# Altium PCB TIDA-010056.PcbDoc (part 3 of 4)
Units mil, origin at the board's own origin, x right, y up, seen from the top; angles counter-clockwise.
Board outline 2716.54 x 2756 mil, 4 copper layers (Top Layer, GND, PWR, Bottom Layer), stack 63.2 mil thick; 152 components, 93 nets, 418 pads, 601 vias.
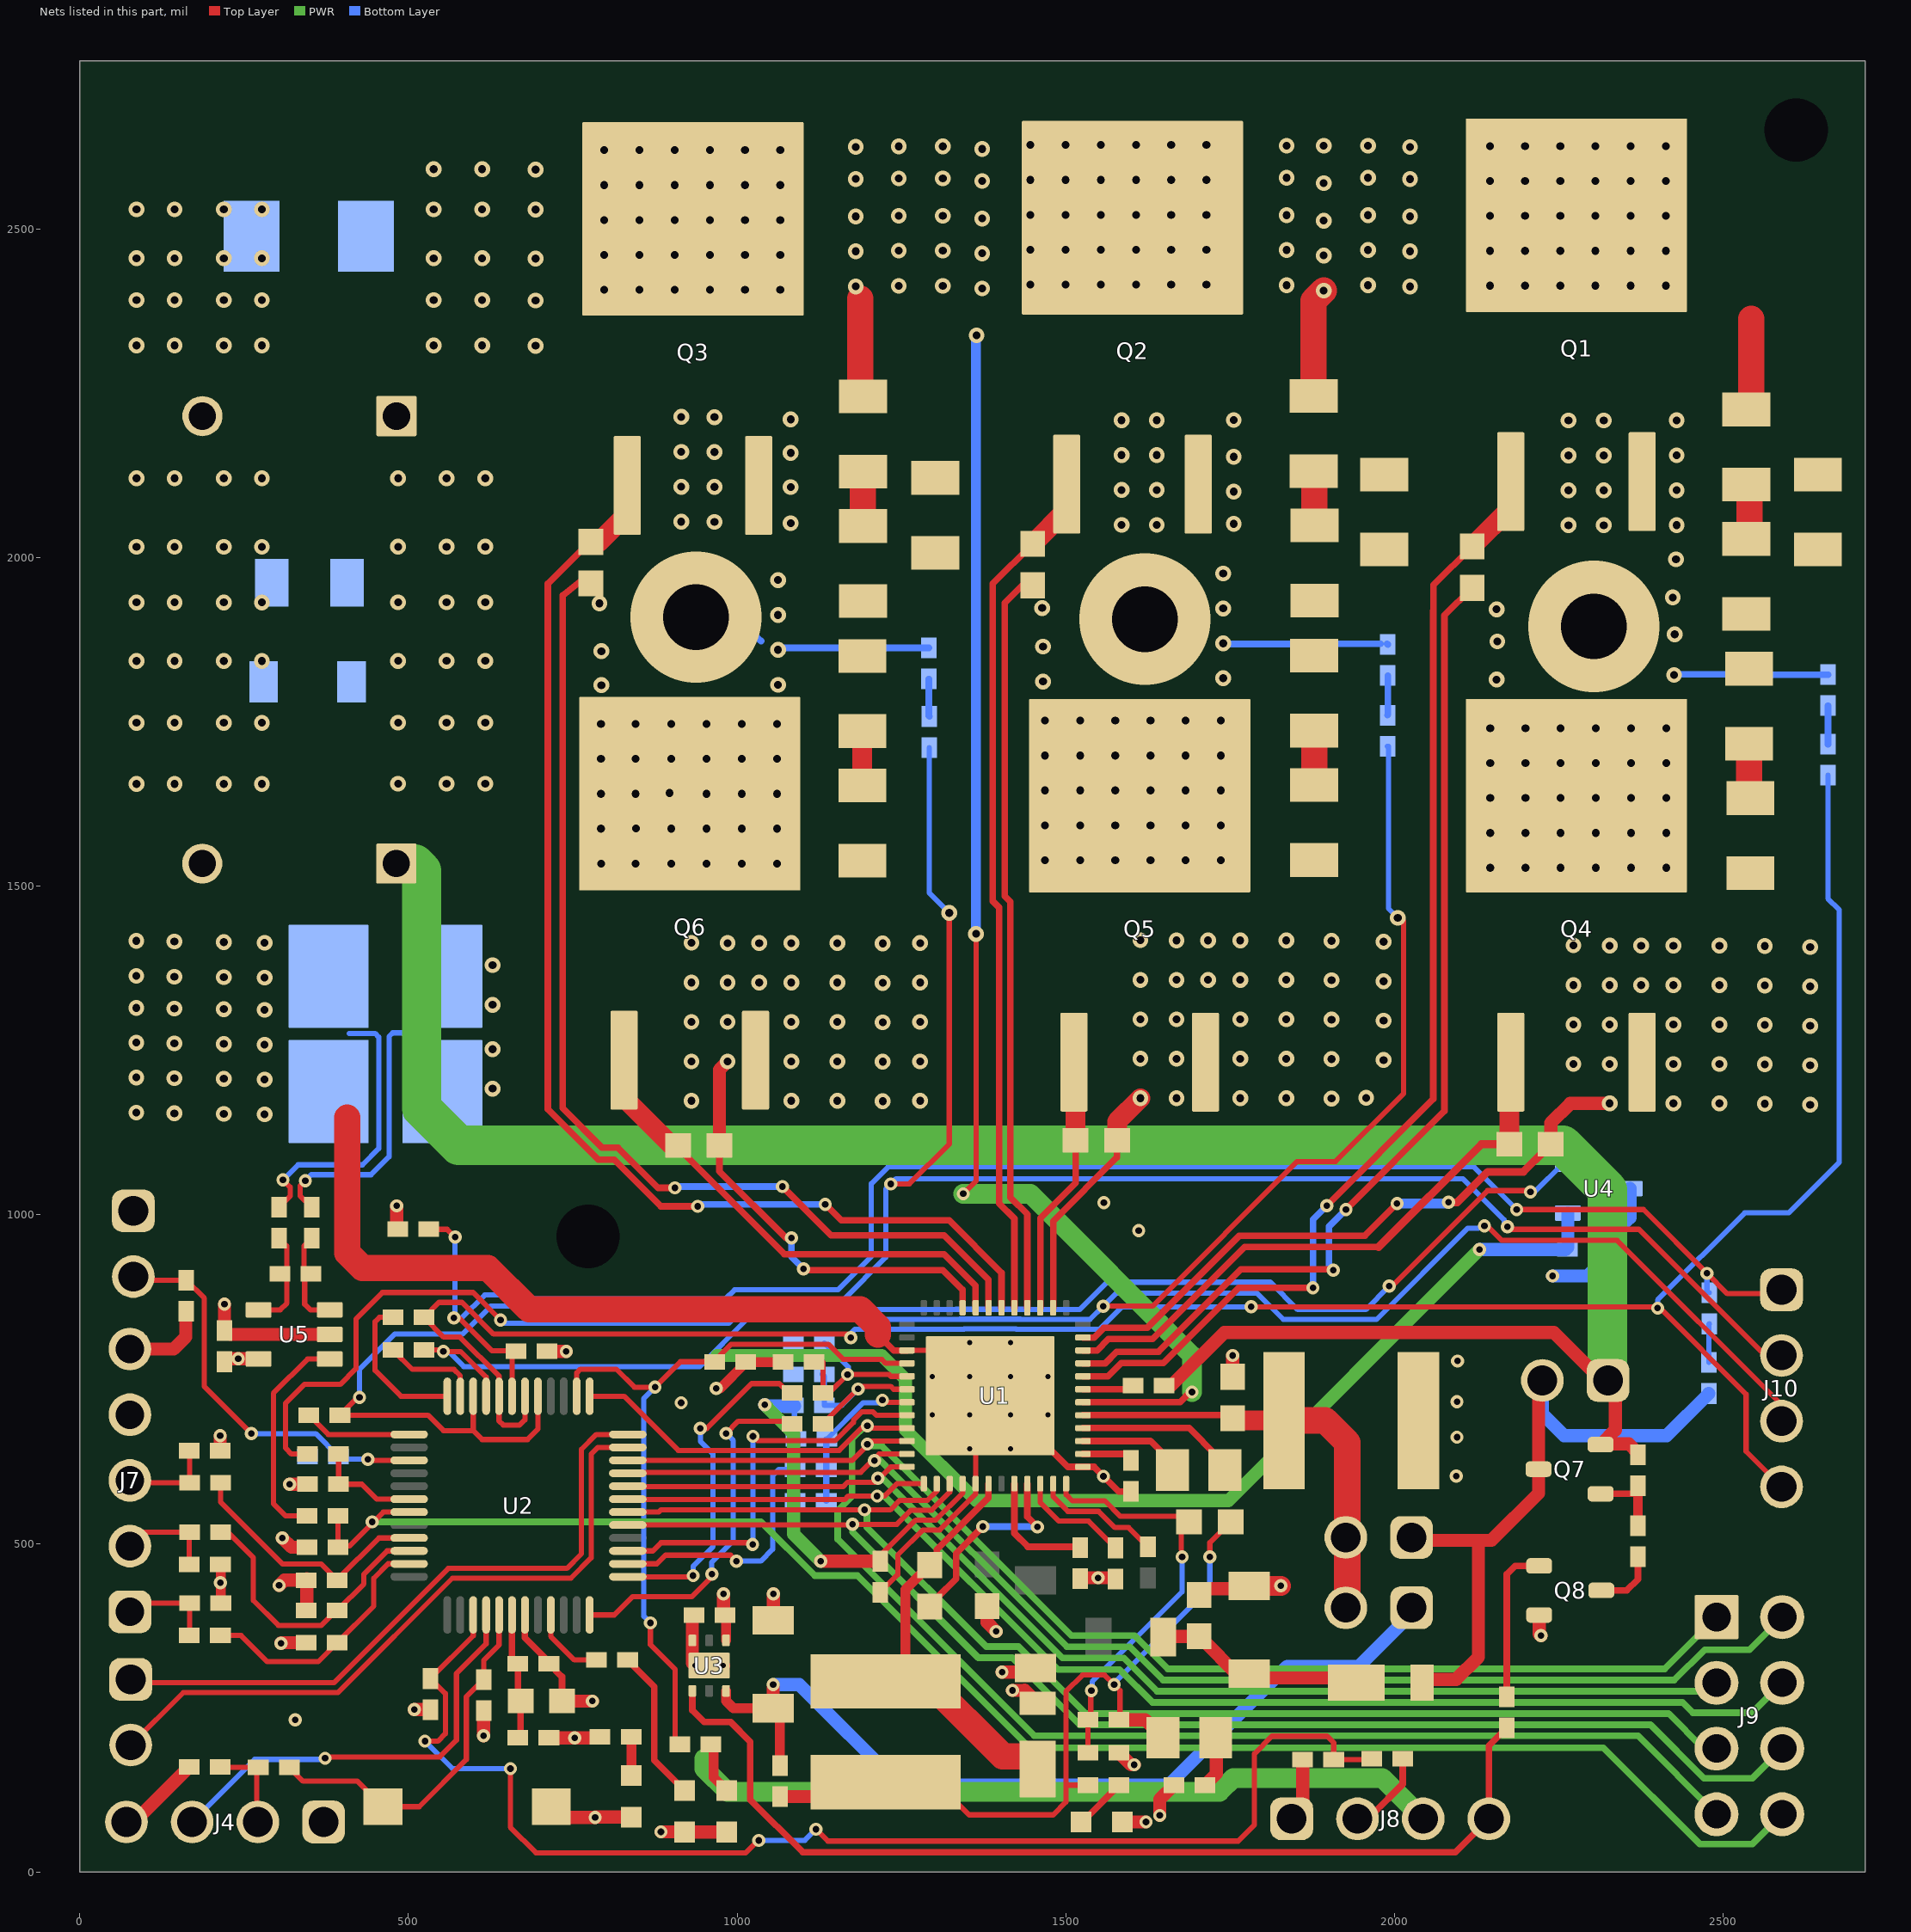
[diagram p4: the nets of this part, all layers, seen from the top]

## Part data (continued)
R63: library part CMP-0026660-1, "RES, 1.00 M, 1%, 0.1 W, 0402", Manufacturer=Panasonic, Power_W=100mW, Supplier Part Number 1=P1.00MLCT-ND, TempCo="100 ppm/C", Tolerance_%=1%, Value2=0.1W, Value_Code=1M00, ValueDisplayed=1.00M, AEC Category=Q200, AEC Qualified=?, ComponentLink1Description="Datasheet link", ComponentLink1URL=http://industrial.panasonic.com/www-data/pdf/AOA0000/AOA0000CE2.pdf, CompType=Resistor, EIA_Code=E96, LatestRevisionDate=2017-03-09, MountType=SMT, PackageReference=0402, PartNumber=ERJ-2RKF1004X, Published=2008-06-26, Publisher="Texas Instruments", Res_ohm=1M, RoHS=Y, SizeArea_mm2=0.5, SizeX_mm=1, SizeY_mm=0.5, SizeZ_mm=0.6, Supplier 1=Digi-Key, Supplier 2=Newark, Supplier 3=Mouser, Supplier Part Number 2=64R5250, Supplier Part Number 3=667-ERJ-2RKF1004X, Technology="Thick Film", U/M=EA, Value1=1%, VDC_V=50V
S1: library part CMP-0002196-1, "Switch, Tactile, SPST, 12 V, SMD", CurrentRating_mA=50A, Manufacturer="Wurth Elektronik", Supplier Part Number 1=31T8978, Circuit=SPST, ComponentLink1Description="Datasheet URL", ComponentLink1URL=http://katalog.we-online.de/em/datasheet/434121025816.pdf, CompType=Switch, LatestRevisionDate=2017-03-09, MountType=SMT, Orientation="Top Actuated", PackageReference="SMD, 6x3.9mm", PartNumber=434121025816, PositionCount=1, Publisher="Texas Instruments", RoHS=Y, Supplier 1=Newark, Supplier 2=Farnell, Supplier Part Number 2=1867991, SwitchFunction=Off-On, VDC_V=12V
U1: library part CMP-0013784-3, "100-V Three-Phase Smart Gate Driver With Buck Regulator, RGZ0048L (VQFN-48)", Alternate Manufacturer="Texas Instruments", Alternate PartNumber=DRV8350RHRGZT, Operating Temperature Range="-40 to 125 C", Rating=Catalog, AEC Category=Q200, AEC Qualified=N, ComponentLink1Description="Datasheet Link", ComponentLink1URL=http://www.ti.com/lit/ds/symlink/drv8350r.pdf, ComponentLink2Description="Product Folder", ComponentLink2URL=http://www.ti.com/product/drv8350r, ComponentLink3Description="Online Datasheet", ComponentLink3URL=http://www.ti.com/product/drv8350r/datasheet, CompType=IC, Manufacturer="Texas Instruments", MountType=SMT, PackageDescription=VQFN-48, PackageReference=RGZ0048L, PartNumber=DRV8350RHRGZR, RoHS=Y, SizeArea_mm2=49, SizeAreaWB_mm2=81, SizeX_mm=7, SizeY_mm=7, SizeZ_mm=1
U2: library part CMP-0013603-2, "Mixed-Signal Microcontroller, PT0048A (LQFP-48)", Alternate Manufacturer="Texas Instruments", ComponentLink1Description="Datasheet Link", ComponentLink1URL=https://sps06.itg.ti.com/sites/KMS/crossdivteams/altium/docs/ComponentDatasheets/SLASEC4_MSP430FR2355.int.1.0.pdf, CompType=IC, LatestRevisionDate=2017-03-09, Manufacturer="Texas Instruments", MountType=SMT, PackageDescription=LQFP-48, PackageReference=PT0048A, PartNumber=MSP430FR2355TPTR, Publisher="Texas Instruments", SizeArea_mm2=81, SizeAreaWB_mm2=121, SizeX_mm=9, SizeY_mm=9, SizeZ_mm=1.6, U/M=EA
U3: library part CMP-0066782-1, "150-mA, 30-V, Ultra-Low IQ, Wide Input Low-Dropout Regulator with Reverse Current Protection, DRV0006A (WSON-6)", Alternate Manufacturer="Texas Instruments", Alternate PartNumber=TPS70933DRVT, ComponentLink1Description="Datasheet Link", ComponentLink1URL=http://www.ti.com/lit/ds/symlink/tps709.pdf, CompType=IC, Footprint Path 6=C:\AltiumLibraries\Footprints\TI\.PcbLib, Green_EU RoHS=Passed, Green_EU RoHS-2=Passed, Green_Lifecycle=Active, Green_REACh=Passed, LatestRevisionDate=2017-06-09, Manufacturer="Texas Instruments", MountType=SMT, PackageDescription=WSON-6, PackageReference=DRV0006A, PartNumber=TPS70933DRVR, Publisher="Texas Instruments", RoHS=Y, SizeArea_mm2=4.0, SizeAreaWB_mm2=9.0, SizeX_mm=2.0, SizeY_mm=2.0, SizeZ_mm=0.8, U/M=EA
U4: library part CMP-0013240-1, "TMP235A4DBZR, DBZ0003A (SOP-3)", Alternate Manufacturer="Texas Instruments", ComponentLink1Description="Datasheet Link", ComponentLink1URL="https://sps06.itg.ti.com/sites/KMS/crossdivteams/altium/docs/ComponentDatasheets/TMP235DBZ MECH DRAWING.docx", CompType=IC, Footprint Path 6=C:\AltiumLibraries\Footprints\TI\.PcbLib, LatestRevisionDate=2017-03-09, Manufacturer="Texas Instruments", MountType=SMT, PackageDescription=SOP-3, PackageReference=DBZ0003A, PartNumber=TMP235A4DBZR, Publisher="Texas Instruments", SizeArea_mm2=7.5, SizeAreaWB_mm2=14, SizeX_mm=2.5, SizeY_mm=3, SizeZ_mm=1.12, U/M=EA
U5: library part CMP-0013061-1, "Low- and High-Side Measurement, Multichannel, Voltage Output, Current-Sense Amplifier, DBV0005A (SOT-5)", Alternate Manufacturer="Texas Instruments", PartNumber=INA180A3IDBVR, ComponentLink1Description="Datasheet Link", ComponentLink1URL=https://sps06.itg.ti.com/sites/KMS/crossdivteams/altium/docs/ComponentDatasheets/INA180.pdf, CompType=IC, Footprint Path 6=C:\AltiumLibraries\Footprints\TI\.PcbLib, LatestRevisionDate=2017-03-09, Manufacturer="Texas Instruments", MountType=SMT, PackageDescription=SOT-5, PackageReference=DBV0005A, Publisher="Texas Instruments", SizeArea_mm2=8.12, SizeAreaWB_mm2=14.82, SizeX_mm=2.8, SizeY_mm=2.9, SizeZ_mm=1.45, U/M=EA
ZZ1: library part AssemblyNoteLabel, Alternate Manufacturer=-, Alternate PartNumber=-, ClassName=AssemblyNote, CompType=AssemblyNote, LatestRevisionDate=2012-07-31, LatestRevisionNote="Initial Version", Publisher="Texas Instruments", SymbolCreator=a0412235, SymbolVersion=2012-06-14
ZZ2 ZZ3 ZZ4: library part AssemblyNote, Alternate Manufacturer=-, Alternate PartNumber=-, ClassName=AssemblyNote, CompType=AssemblyNote, LatestRevisionDate=2012-06-14, LatestRevisionNote="Initial Version", Publisher="Texas Instruments", SymbolCreator=codlsc, SymbolVersion=2010-05-18

## Via types
v1: diameter 24, hole 12, Top Layer to Bottom Layer, 476 vias
v2: diameter 20, hole 10, Top Layer to Bottom Layer, tented both sides, 108 vias
v3: diameter 19.68, hole 7.87, Top Layer to Bottom Layer, 14 vias
v4: diameter 200, hole 100, Top Layer to Bottom Layer, 3 vias

## Nets (pads, with @x,y where several pads share a name; then routed paths per layer and width w, separated by ;. In a path a pad name is that pad's centre, name@x,y a point inside that pad or via, vN(x,y) a via of type N, cw(c..) or ccw(c..) an arc to the next point about the centre after c; other vN are vias at no path point)
3.3V: C19.2 C37.1 C45.1 D5.2 D6.2 J4.4 J7.5 J8.3 R7.2 R50.1 R51.2 R53.2 R54.2 R55.2 R56.2 R59.2 R66.2 U3.1 U4.1 U5.5 | length 3541.3
  Top Layer w8: U5.5@271.46,781 U5.5@271.87,780.6
  Top Layer w15: R56.2@214.4,408.81 R55.2@214.4,456.81 ; D6.2@919.99,61 D6.2@920.29,60.7 ; v2(968,736) 974.32,736 R66.2@1014.32,776 ; U3.1@983.04,352.33 C37.1@983.04,379.96 ; R66.2@1013.15,776 R66.2@1014.32,776 ; R7.2@1069.87,776.38 1069.49,776 R66.2@1014.32,776
  Top Layer w20: J4.4@70.81,76 82.38,76 R51.2@166.38,160 ; J7.5@76.16,795.81 142.81,795.81 161,814 R53.2@161,851.38 ; R54.2@213.37,641 v2(213.37,663.76) ; C19.2@219,781 U5.5@271.46,781 ; R50.1@713.62,204.24 713.87,204 v2(753,204) 789.71,204 R59.2@791.38,205.66 ; v2(884,61) D6.2@919.99,61 ; D6.2@920.29,60.7 D5.2@984.29,60.7 ; C37.1@979.1,393.96 v2(979.1,423.16)
  PWR w20: 969,786 1220,786 1256,750 1256,673 1364,565 1747.31,565 v2(2129.32,947)
  PWR w30: 950,172.47 950,157.37 985.37,122 1734,122 1755,143 1981.58,143 J8.3@2043.75,80.83
  Bottom Layer w20: v2(2129.32,947) 2258.34,947 2259.34,948 2260.23,947.1 2263.76,950.62 U4.1@2263.76,1002.6
  other v2: 213.79,440.19 241,781
15V: C38.1 J2.1 R28.2 U3.6 | length 1370.8
  Top Layer w15: U3.6@983.04,275.56 983.04,260.32 994.29,249.07 C38.1@1055,249.07 1065,239.07 R28.2@1065,161.97
  Top Layer w20: v2(1054.82,285) 1054.82,249.25 C38.1@1055,249.07
  Bottom Layer w20: v2(1054.82,285) 1094.72,285 1247.72,132 1655.91,132 1836.91,313 1946,313 2026,393 J2.1@2026,402
BEMF_A: J10.4 R40.1 R46.2 U2.30 U2.32 | length 3556.9
  Top Layer w8: U2.30@677.16,723.8 677.16,688.16 669,680 644,680 637.79,686.21 U2.32@637.79,723.8 637.79,754.6 578.39,814 553.61,814 R46.2@523.62,843.99 546.33,866.7 581.17,866.7 629.39,818.48 1167.52,818.48 v2(1173,813) ; v2(1782,860) 2402,860 2535,727 2535,640 J10.4@2589,586
  Bottom Layer w8: v2(1173,813) 1173,819.35 1179.51,825.85 1344.98,825.85 1345.35,826.23 1424.43,826.23 1424.8,825.85 1551.85,825.85 1586,860 v2(1782,860) ; v2(2400.49,858) 2400.49,870.49 2533,1003 2600,1003 2676.45,1079.45 2676.45,1464.5 2659.64,1481.31 R40.1@2659.64,1668.89
BEMF_AL: R46.1 U2.36 | length 230.5
  Top Layer w8: R46.1@476.38,843.99 455.77,843.99 449,837.21 449,763.27 488.46,723.8 U2.36@559.05,723.8
BEMF_B: J10.3 R41.1 R45.2 U2.33 | length 3565.3
  Top Layer w8: R45.2@523.62,794.38 558.62,794.38 v2@556.24,792 ; v2(553,792) v2@556.24,792 ; U2.33@618.1,723.8 618.1,753.07 579.17,792 v2@556.24,792 ; v2(1557,861) 1632,861 1852,1081 1910.45,1081 2014,1184.55 v1@2014,1447 ; v2(2137,983) 2141.3,983 2163.3,961 2339,961 2589,711 J10.3@2589,686
  Bottom Layer w8: v2(553,792) 561,792 584,769 943,769 1014.85,840.85 1338.76,840.85 1339.14,841.23 1430.64,841.23 1431.02,840.85 1536.85,840.85 v2(1557,861) 1577,881 1790.7,881 1830.85,840.85 1972.85,840.85 2111.59,979.59 2127.56,979.59 ; R41.1@1989.45,1713.11 1990.86,1713.11 1990.86,1466.33 v1(2005.19,1452)
BEMF_BL: R45.1 U2.35 | length 154.2
  Top Layer w8: R45.1@476.38,794.38 505.89,764.87 569.03,764.87 578.73,755.16 U2.35@578.73,723.8 ; R45.1@478.38,802.38 R45.1@481.38,799.38
BEMF_C: J10.2 R42.1 R44.2 U2.29 U2.34 | length 3704.6
  Top Layer w8: v2(425.38,722) 422.47,722 R44.2@395.62,695.15 529.63,695.15 553.2,671.58 598.42,671.58 ; U2.34@598.42,723.8 598.42,671.58 ; U2.29@696.84,723.8 696.84,673.84 681,658 612,658 598.42,671.58 ; v2(1233.72,1047) 1262,1047 1322.76,1107.76 v1(1322.76,1459.52) ; v2(2172,982) 2176,978 2372,978 2564,786 J10.2@2589,786
  Bottom Layer w8: v2(425.38,722) 425.38,764.87 478.91,818.39 582.39,818.39 625,861 670.93,861 674.93,857 675,857 682,850 981.34,850 1002.19,870.85 1161.49,870.85 1226,935.36 1226,1039.28 v2(1233.72,1047) 1241.72,1055 2104.14,1055 2166.79,992.35 v2@2166.79,982.79 ; R42.1@1292.45,1711.23 1292.45,1489.83 v1(1322.76,1459.52)
BEMF_CL: R44.1 U2.37 | length 164.8
  Top Layer w8: R44.1@348.38,695.15 377.8,665.73 U2.37@500.98,665.73
DC_FB: C33.1 J10.1 R39.1 R47.2 U2.31 | length 2658.7
  Top Layer w8: R47.2@530.62,978 558.84,978 v2(570.84,966) ; v2(569,843) 577,843 627,793 C33.1@657.65,793 ; U2.31@657.47,723.8 657.47,792.82 C33.1@657.65,793 ; C33.1@663.64,792.19 662.82,793 C33.1@657.65,793 ; v2(2186,1008) 2379,1008 v2@2475.74,911.26 ; v2(2475.49,911) 2506.49,880 2583,880 J10.1@2589,886
  Bottom Layer w8: v2(569,843) 581,843 616,878 675.15,878 681.15,872 982.12,872 995.98,885.85 1153.42,885.85 1204,936.44 1204,1047.36 1229.64,1073 2121,1073 v2(2186,1008) ; v2@569.7,843.7 570.84,844.84 v2(570.84,966) ; v2(2475.49,911) 2475.49,884.76 R39.1@2479,881.24 ; J10.1@2584.24,881.24 J10.1@2589,886
DIR: C39.1 J6.2 R53.1 U2.39 | length 620.2
  Top Layer w8: J6.2@76.16,906 81.54,900.62 R53.1@161.74,900.62 ; R53.1@162.37,900 R53.1@161.74,900.62 ; v2(261,667) 189.32,738.68 189.32,873.05 R53.1@161.74,900.62 ; v2(438,628) 439.64,626.36 U2.39@500.98,626.36
  Bottom Layer w8: v2(261,667) 358.71,667 C39.1@393.62,632.09 397.71,628 v2(438,628)
DVDD: C9.1 R5.1 R8.1 U1.40 | length 634.7
  Top Layer w8: C9.1@1217.64,472.82 1217.64,481.38 1271.79,535.54 1302.1,535.54 1343.08,576.52 U1.40@1343.08,590.82
  Top Layer w20: v2(1127,473) 1127.18,472.82 C9.1@1217.64,472.82
  PWR w20: v2@1046,707 1086,667 1086,514 v2(1127,473)
  Bottom Layer w8: R8.1@1087.25,665.86 R5.1@1087.25,708.41
  Bottom Layer w20: v2(1042,711) 1044,709 R5.1@1087.38,709
ENABLE_GD: J9.7 U1.33 U2.25 | length 2239.9
  Top Layer w8: U2.25@775.58,723.8 827.98,723.8 910.42,641.36 1155.4,641.36 v2@1198.04,684 ; v2(1198.04,679) 1201.57,675.46 U1.33@1258.43,675.46
  PWR w10: v2(1198.04,679) 1194.89,679 1175,659.11 1175,572 1153,550 1153,506 1452,207 2370.78,207 J9.7@2490,87.78
FAULT: R64.1 R66.1 U1.28 U2.26 | length 1168.6
  Top Layer w8: U2.26@755.9,723.8 755.9,759.57 761.54,765.21 816,765.21 843.52,737.7 v2(875,737.7) 913.53,776.22 913.53,776.38 964.38,776.38 991,803 1138.6,803 1161.6,780 1220,780 1226.11,773.89 U1.28@1258.43,773.89 ; v2(868,379) 868,346 905.76,308.24 905.76,194.12 R64.1@912.72,194.12
  Bottom Layer w8: v2(868,379) 858,389 858,720.7 v2(875,737.7)
GHA: C20.1 Q1.1 U1.8 | length 1757.1
  Top Layer w10: U1.8@1526.15,754.2 1564.2,754.2 1584.54,774.54 1648.54,774.54 1763,889 v2(1876,889) ; v2(1897,1014) 2059,1176 2059,1919.05 2059.45,1919.49 2059.45,1958.44 C20.1@2118.02,2017.01
  Top Layer w30: C20.1@2118.02,2017.01 2176.95,2075.94 Q1.1@2176.95,2115.73
  Bottom Layer w10: v2(1876,889) 1876,993 v2(1897,1014)
GHB: C22.1 Q2.1 U1.17 | length 1315.3
  Top Layer w10: U1.17@1421.82,858.54 1421.82,994.39 1398.8,1017.42 1398.8,1467.64 1389,1477.44 1389,1960.56 C22.1@1449.45,2021.01 ; Q2.1@1493.04,2109 Q2.1@1494.33,2107.71
  Top Layer w30: C22.1@1449.45,2021.01 1501.45,2073.01 Q2.1@1501.45,2111.86
GHC: C46.1 Q3.1 U1.18 | length 1862.9
  Top Layer w10: C46.1@777.45,2026.01 712.06,1960.62 712.06,1160.74 788.89,1083.91 812.91,1083.91 883.82,1013 v2(940,1013) ; v2(1134,1016) 1158.5,991.5 1322.5,991.5 1402.13,911.87 U1.18@1402.13,858.54
  Top Layer w30: C46.1@777.45,2024.01 789.94,2024.01 832.76,2066.82 Q3.1@832.76,2110.08 Q3.1@832.76,2114.82
  Bottom Layer w10: v2(940,1013) 943.59,1016.59 944.18,1016 v2(1134,1016)
GLA: C48.1 Q4.1 U1.10 | length 904.5
  Top Layer w10: U1.10@1526.15,793.57 1547.57,793.57 1565,811 1632,811 1772,951 1976,951
  Top Layer w12: 1976,951 2132.52,1107.52 C48.1@2174.95,1107.52
  Top Layer w30: C48.1@2174.95,1107.52 2174.95,1230.43 Q4.1@2176.87,1232.35
GLB: C49.1 Q5.1 U1.15 | length 397.1
  Top Layer w10: U1.15@1461.19,858.54 1461.19,994.87 1514.95,1048.64 C49.1@1514.95,1113.52
  Top Layer w30: Q5.1@1512.45,1232.35 1514.95,1229.84 C49.1@1514.95,1113.52
GLC: C47.1 Q6.1 U1.20 | length 756.9
  Top Layer w10: C47.1@897.5,1106 C47.1@903.97,1099.53 ; C47.1@909.95,1105.52 909.95,1101.95 1071.9,940 1315,940 1362.76,892.24 U1.20@1362.76,858.54
  Top Layer w30: Q6.1@824.31,1181.73 824.31,1181.65 900.45,1105.52 C47.1@909.95,1105.52 ; Q6.1@827.9,1181.73 Q6.1@827.9,1235.25
GND: C1.2 C2.2 C3.2 C4.2 C5.2 C6.2 C9.2 C19.1 C23.2 C27.2 C28.2 C29.2 C30.2 C31.2 C32.2 C33.2 C34.2 C35.2 C36.2 C37.2 C38.2 C39.2 C40.2 C41.2 C42.2 C43.2 C44.2 C45.2 D1.1 D2.2 D4.1 D7.1 J4.1 J6.1 J7.4 J8.1 Q8.2 R4.2 R6.1 R10.1 R24.1 R25.1 R27.1 R31.1 R33.1 R34.1 R47.1 R63.1 S1.1 U1.1 U1.27 U1.41 U1.49@1384.89,724.68 U2.7 U3.3 U3.7 U4.3 U5.2 | length 4190.7
  Top Layer w8: R27.1@303.12,1011.62 320,1028.5 320,1042 v2(309,1053) ; C9.2@1217.64,425.57 1244.33,452.27 1244.33,482.33 1282.54,520.54 1308.31,520.54 1362.76,574.99 U1.41@1362.76,590.82 1362.76,702.55 U1.49@1384.89,724.68 1315.99,793.57 U1.27@1258.43,793.57
  Top Layer w10: U2.7@677.16,391.13 677.16,356.38 713.74,319.8 C35.2@713.74,316.88 ; C35.2@713.62,317 C35.2@713.74,316.88 ; C34.2@733.5,260 733.5,297.13 C35.2@713.74,316.88 ; 1214,818 1238.43,793.57 U1.27@1258.43,793.57 ; U1.49@1384.89,724.68 1394.86,724.68 1503.13,616.41 U1.1@1526.15,616.41 1542.97,616.41 1580.46,578.91 C31.2@1599.19,578.91
  Top Layer w20: C19.1@220,823.62 v2(220,864) ; C19.1@229.24,818 U5.2@380.13,818 ; v2(303,436) 311,444 C41.2@344.38,444 ; v2(306,348) 306,349 C43.2@344.38,349 ; v2(308,508) 322,494 C23.2@345.38,494 ; v2(319,590) C44.2@346.38,590 ; C42.2@344.38,398 345.38,399 C41.2@345.38,445.91 ; v2(482,1013.71) 482,979.38 R47.1@483.38,978 ; v2(509,247) C40.2@533.3,247 ; v2(614.31,207.27) C36.2@614.31,245.61 ; C33.2@710.88,792.19 739.81,792.19 v2(740,792) ; S1.1@717,99.35 733.35,83 v2(784,83) 784.5,83.5 D7.1@839,83.5 ; C34.2@733.5,260 v2(779.61,260) ; C37.2@931.86,383.9 U3.3@931.86,352.33 931.86,317.88 v3(935.8,313.95) U3.7@957.45,313.95 v3(979.1,313.95) ; C38.2@1055,382.93 v2(1055,423.16) ; C30.2@1382,403.17 C30.2@1380.47,404.69 1380.47,379.53 v2(1394,366) ; v2(1403,304) 1447.93,304 C29.2@1454,310.07 ; v2(1419,276.26) 1437.04,276.26 1437.35,276.57 D2.2@1457.19,256.73 ; 1535.6,447.57 R33.1@1566.1,447.57 ; R34.1@1584.46,181.54 R34.1@1580.81,181.54 1599.35,163 v2(1604,163) ; D4.1@1586,76 v2(1622,76) ; v2(1643,86) 1643,110.62 R31.1@1664.38,132 ; C28.2@1703,421.5 1712.5,431 1774.72,431 C27.2@1779.19,435.46 ; C6.2@1753.64,753.5 1756,755.86 1754,757.86 v2(1754,786) ; J8.1@1843.75,80.83 1860.38,97.46 R63.1@1860.38,171 ; Q8.2@2220.26,391 2220.26,362.24 v2(2223,359.5)
  Top Layer w30: C27.2@1779.19,435.46 v2(1827.19,435.46)
  Top Layer w40: 407,1148 407,942 430,919 620.82,919 683.35,856.46 1187.04,856.46 1214,829.5 1214,818
  Bottom Layer w8: v2(309,1053) 332,1076 430,1076 454.81,1100.81 454.81,1270.35 449.16,1276 410,1276
  Bottom Layer w20: v2(2240.49,907) 2294,907 2310.62,923.62 C45.2@2310.62,948 2358.24,995.62 U4.3@2358.24,1040
  other v1: 281,1152.89 218.93,1153.57 143.87,1154.36 85.87,1155.51 281,1205.89 218.93,1207.06 143.87,1207.85 85.87,1209 281,1258.85 218.93,1260.06 143.87,1260.85 85.87,1262 281,1312 218.93,1313.02 143.87,1313.81 85.87,1314.96 281,1360.89 218.93,1361.57 143.87,1362.36 85.87,1363.51 281,1413.89 218.93,1415.06 143.87,1415.85 85.87,1417 86.12,1655.79 144,1655.79 219.07,1655.79 276.94,1655.79 86.12,1748.79 144,1748.79 219.07,1748.79 276.94,1748.79 86.12,1842.79 144,1842.79 219.07,1842.79 276.94,1842.79 86.12,1932 144,1932 219.07,1932 276.94,1932 86.12,2016.51 144,2016.51 219.07,2016.51 276.94,2016.51 86.12,2120.79 144,2120.79 219.07,2120.79 276.94,2120.79 86.12,2323 144,2323 219.07,2323 276.94,2323 86.12,2392 144,2392 219.07,2392 276.94,2392 86.12,2455.72 144,2455.72 219.07,2455.72 276.94,2455.72 86.12,2530.21 144,2530.21 219.07,2530.21 276.94,2530.21
  other v2: 327.61,231.27 1549.19,447.54 1557.21,602 2094.19,602.54 2095.19,661.54 914.73,714 2095.19,715.54 2096.19,777.54 1611,976 1558,1018.53
  other v3: 1353.98,643.97 1415.8,643.97 1296.78,695.54 1353.98,695.54 1415.8,695.54 1473,695.54 1296.78,753.81 1353.98,753.81 1415.8,753.81 1473,753.81 1353.98,805.39 1415.8,805.39
HA: C43.1 R61.2 U2.47 | length 390.3
  Top Layer w8: R61.2@213.78,359.81 245.19,359.81 285,320 362.62,320 C43.1@391.62,349 447,404.38 447,446.94 468.95,468.88 U2.47@500.98,468.88
HB: C42.1 R58.2 U2.46 | length 447.7
  Top Layer w8: R58.2@214.16,516.79 225.36,516.79 264,478.15 264,413 301.81,375.19 367.43,375.19 C42.1@387.09,394.85 ; C42.1@387.09,394 C42.1@387.09,394.85 ; C42.1@387.85,399.35 387.85,400 387.09,400.76 C42.1@387.09,394.85 ; U2.46@500.98,488.57 467.42,488.57 432,453.15 432,438.38 C42.1@391.62,398 390.24,398 C42.1@387.09,394.85
HC: C41.1 R57.2 U2.45 | length 390.1
  Top Layer w8: R57.2@213.99,592 213.99,563.01 308.28,468.72 366.9,468.72 C41.1@391.62,444 ; C41.1@392.62,445.91 454.96,508.25 U2.45@500.98,508.25
IA_IDC: C23.1 J9.8 R23.2 U2.43 | length 2546
  Top Layer w8: R23.2@392.62,542 C23.1@392.62,494 394.62,496 410,496 461.62,547.62 U2.43@500.98,547.62
  PWR w10: v2(444.56,532.69) 1036.19,532.69 1117.89,451 1182.96,451 1444.96,189 2318,189 2464.69,42.31 2544.54,42.31 J9.8@2590,87.78
INH_A: J9.1 U1.34 U2.22 | length 1895.1
  Top Layer w8: U2.22@833.65,626.36 1175.36,626.36 v2@1199,650 ; v2@1204.78,655.78 U1.34@1258.43,655.78
  PWR w10: v2(1198,651) 1201,648 1220.24,648 1508.74,359.5 1604.5,359.5 1655,309 2411.22,309 J9.1@2490,387.78
INH_B: J9.3 U1.36 U2.20 | length 1891.2
  Top Layer w8: U2.20@813.34,586.2 1161.2,586.2 1168,593 1210.03,593 1233.44,616.41 U1.36@1258.43,616.41
  PWR w10: v2(1214,599) 1221.16,599 1494.65,325.5 1588.37,325.5 1638.87,275 2464.45,275 2482.22,292.78 2482.22,280 J9.3@2490,287.78
INH_C: J9.5 U1.38 U2.18 | length 1954.5
  Top Layer w8: U2.18@833.65,547.62 880.62,547.62 884,551 v2(1194,551) 1233,551 1247.54,565.54 1289.67,565.54 1303.71,579.57 U1.38@1303.71,590.82
  PWR w10: v2(1194,551) 1197.36,547.64 1197.36,524.64 1379,343 1428,343 1530,241 2417,241 2470.22,187.78 J9.5@2490,187.78
INL_A: J9.2 U1.35 U2.21 | length 2001.2
  Top Layer w8: U2.21@830.22,608.58 U2.21@833.65,608.58 ; U2.21@833.65,606.68 834.98,608 1188,608 1216.09,636.09 U1.35@1258.43,636.09
  PWR w10: v2@1208,628 1216.2,628 1501.7,342.5 1597.45,342.5 1647.96,292 2426,292 2472,338 2540.22,338 J9.2@2590,387.78
  other v2: 1209,626
INL_B: J9.4 U1.37 U2.19 | length 2013.1
  Top Layer w8: U2.19@813.34,566.51 1163.57,566.51 1169.06,572 v2(1213,572) 1224.3,572 1243.12,590.82 U1.37@1284.02,590.82
  PWR w10: v2(1213,572) 1224.12,572 1488.12,308 1581.83,308 1631.83,258 2438,258 2453.69,242.31 2544.54,242.31 J9.4@2590,287.78
INL_C: J9.6 U1.39 U2.17 | length 2123.7
  Top Layer w8: U2.17@833.65,527.94 1174.3,527.94 v2(1175.36,529) 1243,529 1264.54,550.54 1295.88,550.54 1323.39,578.05 U1.39@1323.39,590.82
  PWR w10: v2(1175.36,529) 1175.36,517.48 1366.85,326 1419.03,326 1521.03,224 2389.48,224 2471.17,142.31 2544.54,142.31 J9.6@2590,187.78
LED: R65.1 U2.9 | length 117.1
  Top Layer w8: U2.9@716.53,391.13 716.53,358.45 752.51,322.47 R65.1@786.09,322.47
NetC5_1: C5.1 C6.1 J1.2 J2.2 U1.5 | length 671.8
  Top Layer w10: U1.5@1526.15,695.15 1741.08,695.15 C6.1@1745.19,691.04
  Top Layer w20: C6.1@1745.19,691.04 C6.1@1756,691.04
  Top Layer w30: C6.1@1756,691.04 1759.95,687.09 C5.1@1831.83,687.09
  Top Layer w40: C5.1@1831.83,687.09 1894.74,687.09 1928.19,653.64 1928.19,404.19 J2.2@1926,402
NetC7_1: C7.1 U1.7 | length 78.5
  Top Layer w8: C7.1@1596.9,734.52 C7.1@1602.38,740
  Top Layer w10: U1.7@1526.15,734.52 C7.1@1596.9,734.52
NetC8_1: C8.1 U1.3 | length 160.6
  Top Layer w10: U1.3@1526.15,655.78 1628.65,655.78 1662.19,622.24 C8.1@1662.19,611.54
NetC8_2: C8.2 U1.4 | length 230.3
  Top Layer w10: U1.4@1526.15,675.46 1687.54,675.46 1729.69,633.31 C8.2@1729.69,624.04
NetC13_1: C13.1 R1.1 | length 83.8
  Top Layer w40: R1.1@2532.51,2109.66 R1.1@2534.76,2111.91 ; C13.1@2540.51,2029.09 R1.1@2540.51,2109.66
NetC14_1: C14.1 R2.1 | length 83.4
  Top Layer w40: R2.1@1877.13,2131.91 1878.45,2130.6 C14.1@1878.45,2049.09
NetC15_1: C15.1 R3.1 | length 82.8
  Top Layer w40: C15.1@1191.45,2048.34 R3.1@1191.45,2131.17
NetC16_2: C16.2 R14.2 | length 83.7
  Top Layer w40: R14.2@2531.76,1636.09 R14.2@2533.76,1634.09 ; R14.2@2539.76,1636.09 C16.2@2539.76,1716.91
NetC17_2: C17.2 R15.2 | length 82.8
  Top Layer w40: R15.2@1877.9,1654.09 C17.2@1877.9,1736.91
NetC18_2: C18.2 R16.2 | length 82.8
  Top Layer w30: R16.2@1190.45,1653.34 C18.2@1190.45,1736.17
NetC21_1: C21.1 R22.2 U5.3 | length 155.4
  Top Layer w8: R22.2@353,964.38 341,952.38 341,920.62 C21.1@351.62,910 342,900.38 342,864 350.6,855.4 U5.3@380.13,855.4
NetC21_2: C21.2 R27.2 U5.4 | length 162.8
  Top Layer w8: U5.4@271.87,855.4 304.78,855.4 315,865.62 315,903.38 C21.2@306.38,912 ; R27.2@303.12,964.38 314.85,952.65 314.85,920.47 C21.2@306.38,912 ; C21.2@304.38,910 C21.2@306.38,912 ; C21.2@305,913.38 C21.2@306.38,912
NetC24_1: C24.1 U1.45 | length 292.4
  Top Layer w10: C24.1@1304.44,417.54 1333,446.1 1333,484.72 v2(1373.82,525.54) ; U1.45@1441.5,590.82 1441.5,540.5 v2(1457,525)
  Bottom Layer w10: v2(1373.82,525.54) 1456.46,525.54 v2(1457,525)
NetC24_2: C24.2 D2.1 L1.1 U1.42 | length 634.4
  Top Layer w10: L1.1@1236,288.77 1237.22,289.99 L1.1@1255.71,308.48 ; C24.2@1303.57,477.39 1303.57,490.47 1382.45,569.35 U1.42@1382.45,590.82
  Top Layer w15: L1.1@1255.71,308.48 1255.71,429.52 C24.2@1293,466.96
  Top Layer w30: L1.1@1226,289.99 1237.22,289.99 L1.1@1290.01,289.99
  Top Layer w40: L1.1@1290.01,289.99 1404,176 1437.53,176 D2.1@1457.19,156.34
NetC25_1: C25.1 C26.1 L1.2 R28.1 R29.2 R30.2 | length 1112
  Top Layer w8: L1.2@1296.51,129 1311,129 1353.11,86.89 1480.89,86.89 1500.19,106.19 1500.19,132.01 ; R30.2@1533.57,132 1500.2,132 ; R29.2@1582.46,237.78 1582.46,276.26 v2(1573.69,285.03) 1559.02,299.7 1525.35,299.7 1500.19,274.54 1500.19,132.01 ; v2(1719.19,479.54) 1719.19,501.2 C25.1@1750.69,532.69
  Top Layer w20: R28.1@1065,114.72 L1.2@1204.28,114.72 ; R29.2@1580.79,231.54 1620.85,231.54 C26.1@1648,204.38
  Bottom Layer w8: v2@1570.86,284.65 1719.19,432.98 v2(1719.19,479.54)
NetC25_2: C25.2 R29.1 R34.2 U1.48 | length 614.8
  Top Layer w8: U1.48@1500.56,590.82 1500.56,574.17 1509.94,564.79 1559.27,564.79 1582.7,541.36 1679.03,541.36 1677.24,536.75 1675.5,532.27 1675.5,490.76 ; R34.2@1533.57,181.54 R29.1@1533.55,231.54 ; R34.2@1534.57,185.48 R34.2@1535.21,186.13 ; R29.1@1535.21,237.78 1537.98,240.54 v2@1537.98,268.54
  Bottom Layer w8: v2@1537.98,268.54 1540.19,270.75 1540.19,289.54 1677,426.35 v2(1677,479.54) v2@1677,483
  other v2: 1539,276
NetC26_2: C26.2 R31.2 | length 88.2
  Top Layer w20: R31.2@1711.62,132 1729,149.38 C26.2@1729,213
NetC27_1: C27.1 C28.1 D3.1 L2.1 | length 326.1
  Top Layer w20: L2.1@1644.81,358.5 C28.1@1703,358.5 1766.24,295.27 1934.78,295.27 D3.1@1941.8,288.24
NetC31_1: C31.1 U1.2 | length 77.2
  Top Layer w10: U1.2@1526.15,636.09 1589.25,636.09 C31.1@1599.19,626.16
NetC34_1: C34.1 C35.1 R50.2 U2.6 | length 194
  Top Layer w10: U2.6@657.47,391.13 657.47,325.91 C35.1@666.38,317 666.38,264.13 C34.1@670.5,260 670.5,208.37 R50.2@666.38,204.24
NetD4_2: D4.2 R30.1 | length 81
  Top Layer w10: D4.2@1523.01,76 1524.81,76 R30.1@1580.81,132
NetD5_1: D5.1 R64.2 | length 78.7
  Top Layer w8: D5.1@981.29,126.7 D5.1@984.29,123.7
  Top Layer w15: R64.2@964.42,194.12 964.42,143.57 D5.1@981.29,126.7
NetD6_1: D6.1 R65.2 | length 237.7
  Top Layer w10: R65.2@833.33,322.47 874,281.8 874,169.98 D6.1@920.29,123.7
  Top Layer w15: D6.1@920.29,120.74 D6.1@920.29,123.7
NetD7_2: D7.2 R59.1 | length 59.3
  Top Layer w15: R59.1@838.62,205.66 839,205.29 D7.2@839,146.5
NetJ4_2: J4.2 R51.1 R52.1 | length 139.2
  Top Layer w8: R51.1@213.62,160 214.62,159 R52.1@271.38,159 269,156.62 J4.2@269,79
NetJ7_1: J7.1 R56.1 R61.1 | length 148.4
  Top Layer w8: J7.1@76.16,395.81 J7.1@98.16,417.81 ; J7.1@99.16,408.81 R56.1@167.16,408.81 167.16,360.43 R61.1@166.54,359.81
NetJ7_2: J7.2 R55.1 R58.1 | length 148.4
  Top Layer w8: J7.2@76.16,495.81 97.13,516.79 R58.1@166.91,516.79 166.54,516.41 R55.1@166.54,468
NetJ7_3: J7.3 R54.1 R57.1 | length 141.4
  Top Layer w8: J7.3@76.16,595.81 79.97,592 R57.1@166.74,592 166.74,640.38 R54.1@166.12,641
NetJ8_2: J8.2 R60.2 | length 126.6
  Top Layer w10: J8.2@1943.75,86.89 1965.89,86.89 2012.62,133.62 R60.2@2012.62,172
NetQ7_1: Q7.1 R43.1 R48.2 | length 101.6
  Top Layer w10: Q7.1@2313.75,575.48 2370.4,575.48 R43.1@2370.51,575.37
  Top Layer w15: R43.1@2370.51,575.37 2370.51,532.48 R48.2@2371.86,531.13
NetQ8_1: Q8.1 R49.1 | length 240.9
  Top Layer w10: R49.1@2171,266.62 2171,453 2183.8,465.8 Q8.1@2220.26,465.8
NetQ8_3: Q8.3 R48.1 | length 96.8
  Top Layer w10: Q8.3@2314.75,428.4 2353.4,428.4 2370.57,445.57 R48.1@2370.57,479.45
NetR4_1: R4.1 R7.1 R9.2 U1.29 | length 252.8
  Top Layer w8: R7.1@1130.62,776 R9.2@1130.62,728.91 1132.71,731 1142,731 v2(1168,757) 1231.2,757 1234,754.2 U1.29@1258.43,754.2
  Bottom Layer w8: R4.1@1132.62,805 1169,768.62 v2@1169,755
NetR5_2: R5.2 R6.2 R13.2 U1.30 | length 263.6
  Top Layer w8: R13.2@1130.62,682 1187.62,739 1233.52,739 1238,734.52 U1.30@1258.43,734.52
  Bottom Layer w8: R6.2@1129.62,757.46 1132.62,754.46 R5.2@1132.62,710.11 1159.11,710.11 v2(1184,735)
NetR8_2: R8.2 R10.2 R17.2 U1.31 | length 242
  Top Layer w8: v2(1221,718) 1224.17,714.83 U1.31@1258.43,714.83
  Bottom Layer w8: R8.2@1135.62,658 R8.2@1136.62,659 1191.62,714 1217,714 v2(1221,718)
  Bottom Layer w10: R10.2@1135.62,565 R17.2@1135.62,612.61 R8.2@1135.62,658
NetR23_1: R23.1 U5.1 | length 333.8
  Top Layer w8: R23.1@345.38,542 312.81,542 294.53,560.29 294.53,728.53 346.6,780.6 U5.1@380.13,780.6
NetR32_2: R32.2 U1.47 | length 195.5
  Top Layer w8: U1.47@1480.87,590.82 1480.87,571.13 1503.21,548.79 1550,548.79 1574.79,524 1595.62,524 R32.2@1625,494.62
NetR33_2: R33.2 U1.46 | length 171.6
  Top Layer w8: U1.46@1461.19,590.82 1461.19,562.06 1489.46,533.79 1534.85,533.79 R33.2@1575.48,493.16
NetR35_1: R35.1 R39.2 | length 59.1
  Bottom Layer w8: R35.1@2478.27,775.24 2478.27,833.27 R39.2@2479,834
NetR36_1: R36.1 R40.2 | length 58.8
  Bottom Layer w10: R40.2@2659.64,1716.14 R36.1@2659.64,1774.89
NetR37_1: R37.1 R41.2 | length 60.6
  Bottom Layer w10: R41.2@1989.45,1760.35 1989.93,1760.84 R37.1@1989.93,1820.73
NetR38_1: R38.1 R42.2 | length 57.5
  Bottom Layer w10: R38.1@1291.57,1815.58 1291.57,1759.35 R42.2@1292.45,1758.47
NetR62_2: R62.2 U4.2 | length 2318.5
  Top Layer w8: R62.2@346.38,636 322,636 313,645 313,713.39 341.61,742 396.09,742 420,765.91 420,841.36 460.34,881.7 598.3,881.7 v2(640,840) ; v2(1992,891.39) 1996.39,891.39 2141.74,1036.74 2205.08,1036.74 v2(2207,1034.82)
  Bottom Layer w8: v2(640,840) 645,835 987.55,835 1008.4,855.85 1332.55,855.85 1332.92,856.23 1436.85,856.23 1437.23,855.85 1521.07,855.85 1562.6,897.39 1811.36,897.39 1852.9,855.85 1956.46,855.85 v2(1992,891.39) ; v2(2207,1034.82) 2213.42,1034.82 U4.2@2256,1077.4
POWER_ON: J8.4 R49.2 U3.4 | length 1553.5
  Top Layer w10: U3.4@931.86,275.56 931.86,245.73 949.59,228 990.04,228 1020,198.04 1020,110 1100,30 2092.92,30 J8.4@2143.75,80.83 2143.75,192.13 R49.2@2171,219.38
RST: C36.1 R52.2 S1.2 U2.5 | length 564.5
  Top Layer w8: R52.2@318.62,159 339.62,138 422.39,138 S1.2@461.09,99.35 ; S1.2@461.09,99.35 516.35,99.35 587.94,170.94 587.94,266.47 C36.1@614.31,292.85 614.31,322.01 637.79,345.48 U2.5@637.79,391.13
SCLK: R17.1 U2.14 | length 387.3
  Top Layer w8: U2.14@833.65,468.88 877.88,468.88 891,482 990,482 v2(999,473)
  Bottom Layer w8: v2(999,473) 1036,473 1054,491 1054,603 1063.61,612.61 R17.1@1088.38,612.61
SCS: U1.32 U2.15 | length 630.2
  Top Layer w8: U2.15@833.65,488.57 871.73,488.57 884.17,501 1026,501 v2(1023.5,498.5) ; v2(1024,663) 1030.64,656.36 1149.18,656.36 1177.04,684.21 1177.04,687.7 1189.34,700 1206.73,700 1211.58,695.15 U1.32@1258.43,695.15
  Bottom Layer w8: v2(1024,663) 1024,499 v2(1023.5,498.5) 1023.5,495.5 v2@1025,494
SDI: R13.1 U2.12 | length 556.1
  Top Layer w8: U2.12@775.58,391.13 813.13,391.13 840.81,418.81 930.81,418.81 961.4,449.4 v2(961.4,453.4) ; v2(983,667.39) 1001.61,686 1079.38,686 R13.1@1083.38,682
  Bottom Layer w8: v2(961.4,453.4) 961,453.8 961,471 994,504 994,656.39 v2(983,667.39)
SDO: R9.1 U2.13 | length 516.7
  Top Layer w8: U2.13@833.65,449.2 931.2,449.2 v2(933,451) ; v2(944,675) 954,675 1022,743 1064,743 1074.62,732.38 R9.1@1083.38,732.38
  Bottom Layer w8: v2(933,451) 933,465 963.4,495.4 963.4,635.9 944,655.3 v2(944,675)
SHA: C13.2 C16.1 C20.2 Q1.3 Q4.2 R36.2 U1.9 | length 1806.1
  Top Layer w10: U1.9@1526.15,773.89 1559.85,773.89 1577.49,791.54 1640.97,791.54 1766.28,916.85 1906.01,916.85 v2(1907,915.86) ; v2(1926.26,1008) 2076,1157.74 2076,1912 C20.2@2118.02,1954.02
  Bottom Layer w10: v2(1907,915.86) 1900.41,922.45 1900.41,982.15 v2(1926.26,1008) ; v1(2425.45,1821.52) 2426.29,1822.36 2563.45,1822.36 2563.67,1822.14 R36.2@2659.64,1822.14
  other v1: 2145.82,1528.07 2199.36,1528.07 2252.91,1528.07 2306.45,1528.07 2359.99,1528.07 2413.54,1528.07 2145.82,1581.22 2199.36,1581.22 2252.91,1581.22 2306.45,1581.22 2359.99,1581.22 2413.54,1581.22 2145.82,1634.37 2199.36,1634.37 2252.91,1634.37 2306.45,1634.37 2359.99,1634.37 2413.54,1634.37 2145.82,1687.52 2199.36,1687.52 2252.91,1687.52 2306.45,1687.52 2359.99,1687.52 2413.54,1687.52 2145.82,1740.66 2199.36,1740.66 2252.91,1740.66 2306.45,1740.66 2359.99,1740.66 2413.54,1740.66 2155.45,1814.52 2156.45,1872.52 2426.45,1883.52 2155.45,1921.52 2423.45,1939.52 2428.45,1997.52 2264.91,2049.37 2318.45,2049.37 2429.45,2049.55 2264.91,2102.52 2318.45,2102.52 2429.45,2102.7 2264.91,2155.66 2318.45,2155.66 2429.45,2155.85 2264.91,2208.81 2318.45,2208.81 2429.45,2209
  other v4: 2303.45,1895.52
SHB: C14.2 C17.1 C22.2 Q2.3 Q5.2 R37.2 U1.16 | length 1520.8
  Top Layer w10: U1.16@1441.5,858.54 1441.5,1000.59 1415.8,1026.3 1415.8,1476.2 1407,1485 1407,1931.07 1433.95,1958.02 C22.2@1449.45,1958.02 ; Q5.2@1589.79,1637.86 Q5.2@1612.45,1637.86
  Bottom Layer w10: v1@1733.85,1869.72 1734.81,1868.76 1849.93,1868.76 ; v1(1739.45,1869.72) 1740.2,1868.97 R37.2@1978.93,1868.97 ; R37.2@1988.93,1868.97 R37.2@1989.93,1867.97
  other v1: 1468.22,1539.57 1521.76,1539.57 1575.31,1539.57 1628.85,1539.57 1682.39,1539.57 1735.94,1539.57 1468.22,1592.72 1521.76,1592.72 1575.31,1592.72 1628.85,1592.72 1682.39,1592.72 1735.94,1592.72 1468.22,1645.87 1521.76,1645.87 1575.31,1645.87 1628.85,1645.87 1682.39,1645.87 1735.94,1645.87 1468.22,1699.02 1521.76,1699.02 1575.31,1699.02 1628.85,1699.02 1682.39,1699.02 1735.94,1699.02 1468.22,1752.17 1521.76,1752.17 1575.31,1752.17 1628.85,1752.17 1682.39,1752.17 1735.94,1752.17 1465.4,1811.57 1739.45,1816.57 1465.4,1864.72 1739.45,1922.87 1463.95,1923.52 1739.45,1976.02 1584.91,2049.88 1638.45,2049.88 1755.45,2051.52 1755.45,2100.52 1584.91,2103.03 1638.45,2103.03 1755.45,2153.52 1584.91,2156.18 1638.45,2156.18 1584.91,2209.33 1638.45,2209.33 1755.45,2209.52
  other v4: 1620.45,1906.52
SHC: C15.2 C18.1 C46.2 Q3.3 Q6.2 R38.2 U1.19 | length 1937.8
  Top Layer w10: C46.2@763.27,1961.02 C46.2@777.45,1961.02 ; C46.2@769.85,1970.64 734.65,1942.84 734.65,1162.19 794.39,1102.45 818.55,1102.45 880,1041 v2(905.45,1041) ; Q6.2@904.58,1641.25 Q6.2@927.9,1641.25 ; v2(1068.81,1043) 1142.81,969 1315,969 1382.45,901.55 U1.19@1382.45,858.54
  Bottom Layer w10: v2@914,1043 v2(1068.81,1043) ; v4@998.9,1910.73 1036.4,1873.23 ; v1(1062.14,1859.74) 1065.22,1862.82 R38.2@1291.57,1862.82
  other v1: 793.29,1534.27 845.54,1534.46 899.87,1534.46 953.42,1534.46 1006.96,1534.46 1060.5,1534.46 792.79,1587.61 846.29,1587.91 899.87,1587.61 953.42,1587.61 1006.96,1587.61 1060.5,1587.61 792.79,1640.76 845.54,1640.76 953.42,1640.76 1006.96,1640.76 1060.5,1640.76 897.29,1641.91 792.79,1693.91 845.54,1693.91 899.87,1693.91 953.42,1693.91 1006.96,1693.91 1060.5,1693.91 792.79,1747.06 845.54,1747.06 899.87,1747.06 953.42,1747.06 1006.96,1747.06 1060.5,1747.06 793.42,1806.02 1062.14,1806.59 793.42,1857.74 1062.14,1912.89 790.45,1930.52 1062.14,1966.04 1081.45,2052.52 914.99,2054.86 965.45,2054.56 914.99,2108.01 965.45,2107.71 1081.45,2107.52 1081.45,2159.52 914.99,2161.16 965.45,2160.86 1081.45,2210.52 914.99,2214.31 965.45,2214.01
  other v4: 937.45,1909.52
SLA: C10.2 C11.2 C12.2 C47.2 C48.2 C49.2 Q4.3 Q5.3 Q6.3 R14.1 R15.1 R16.1 R22.1 R24.2 R25.2 U1.11 U1.14 U1.21 | length 2421.6
  Top Layer w8: v2(343,1052) 335,1044 335,1028.84 352.22,1011.62 R22.1@353,1011.62 ; Q6.3@1027.9,1235.73 Q6.3@1028.39,1235.24
  Top Layer w10: C47.2@972.94,1105.52 972.94,1066.5 1074.44,965 v2(1082.45,965) ; v2@1101,916 1313,916 1343.08,885.92 U1.21@1343.08,858.54 ; U1.14@1480.87,858.54 1480.87,990.52 1577.94,1087.59 C49.2@1577.94,1113.52 ; U1.11@1526.15,813.26 1543.22,813.26 1557.96,828 1624,828 1764,968 1955,968 v2(2004,1017)
  Top Layer w12: v2(2082.45,1019) 2095.64,1019 2142.05,1065.4 2196.27,1065.4 C48.2@2229.88,1099.01
  Top Layer w20: C47.2@972.94,1105.52 972.94,1221.01 v1(985.45,1233.52) ; C48.2@2237.94,1107.52 2237.94,1139.94 2267.52,1169.52 v1(2327.45,1169.52)
  Top Layer w30: C49.2@1577.94,1113.52 1577.94,1142.01 v1(1613.45,1177.52)
  Bottom Layer w8: v2(343,1052) 352,1061 443,1061 470.35,1088.35 470.35,1271.35 475.98,1276.98 521,1276.98
  Bottom Layer w10: v2(1082.45,965) 1082.45,936.16 v2(1101,917.61)
  Bottom Layer w15: v2(2004,1017) 2080.45,1017 v2(2082.45,1019)
  other v1: 2632.45,1167.52 2563.45,1169.01 2424.45,1169.52 2494.45,1169.52 1221.45,1173.01 930.45,1173.52 1082.45,1173.52 1152.45,1173.52 1278.45,1173.52 1904.45,1177.01 1668.45,1177.52 1765.45,1177.52 1835.45,1177.52 1957,1178 628,1192 2632.45,1227.52 2563.45,1229.01 2272.45,1229.52 2327.45,1229.52 2424.45,1229.52 2494.45,1229.52 1221.45,1233.01 930.45,1233.52 1082.45,1233.52 1152.45,1233.52 1278.45,1233.52 1983.45,1235.52 1904.45,1237.01 1613.45,1237.52 1668.45,1237.52 1765.45,1237.52 1835.45,1237.52 628,1252 2632.45,1287.52 2563.45,1289.01 2272.45,1289.52 2327.45,1289.52 2424.45,1289.52 2494.45,1289.52 1221.45,1293.01 930.45,1293.52 985.45,1293.52 1082.45,1293.52 1152.45,1293.52 1278.45,1293.52 1983.45,1295.52 1904.45,1297.01 1613.45,1297.52 1668.45,1297.52 1765.45,1297.52 1835.45,1297.52 628,1319.64 2632.45,1347.52 2563.45,1349.01 2272.45,1349.52 2327.45,1349.52 2375.44,1349.52 2424.45,1349.52 2494.45,1349.52 1221.45,1353.01 930.45,1353.52 985.45,1353.52 1033.44,1353.52 1082.45,1353.52 1152.45,1353.52 1278.45,1353.52 1983.45,1355.52 1904.45,1357.01 1613.45,1357.52 1668.45,1357.52 1716.44,1357.52 1765.45,1357.52 1835.45,1357.52 628,1380 2632.45,1407.52 2563.45,1409.01 2272.45,1410.01 2327.45,1409.52 2375.44,1409.52 2424.45,1409.52 2494.45,1409.52 1221.45,1413.01 930.45,1414.01 985.45,1413.52 1033.44,1413.52 1082.45,1413.52 1152.45,1413.52 1278.45,1413.52 1983.45,1415.52 1904.45,1417.01 1613.45,1418.01 1668.45,1417.52 1716.44,1417.52 1765.45,1417.52 1835.45,1417.52
SPEED_REF: C40.1 R60.1 R63.2 U2.3 | length 1998.1
  Top Layer w8: v2(525,199) 544.63,199 556.13,210.5 556.13,271.42 C40.1@533.31,294.23 598.42,359.33 U2.3@598.42,391.13 ; v2(655,157.16) 655,68 694,29 1013,29 1032,48 v2(1033,48) ; v2(1120,65) 1138.02,46.98 1762.43,46.98 1787,71.55 1787,180 1813.54,206.54 1897.65,206.54 1907.62,196.57 R63.2@1907.62,171 1964.38,171 R60.1@1965.38,172
  Bottom Layer w8: v2(525,199) 566.84,157.16 v2(655,157.16) ; v2(1033,48) 1103,48 v2(1120,65)
TEMP_SENSE: C44.1 R62.1 U2.42 | length 162.8
  Top Layer w8: R62.1@393.62,636 C44.1@393.62,590 429,590 451.69,567.31 U2.42@500.98,567.31
TEST: J4.3 U2.4 | length 664.1
  Top Layer w8: v2(373,173) 375,175 547.53,175 572.94,200.41 572.94,301.84 618.1,347.01 U2.4@618.1,391.13
  Bottom Layer w8: J4.3@170.81,76 266,171.19 373,171.19 v2(373,173)
UART_RX: J5.1 U2.24 | length 1011
  Top Layer w8: J5.1@72.17,287.93 386.45,287.93 560.52,462 740.79,462 763,484.21 763,643 785.73,665.73 U2.24@833.65,665.73
UART_TX: J5.2 U2.23 | length 1036.5
  Top Layer w8: J5.2@77.31,193.07 157.17,272.93 392.67,272.93 566.73,447 747,447 778,478 778,636 788.05,646.05 U2.23@833.65,646.05
VCC: C32.1 U1.44 | length 182.3
  Top Layer w10: U1.44@1421.82,590.82 1421.82,515.18 1442.19,494.81 C32.1@1520.03,494.81
VDC: C1.1 C2.1 C3.1 C4.1 C7.2 C10.1 C11.1 C12.1 D1.2 J3.1 Q1.2 Q2.2 Q3.2 Q7.2 R1.2 R2.2 R3.2 R43.2 U1.6 | length 5859.2
  Top Layer w8: v2@1341,1035 v2(1344,1032) 1363.45,1051.45 v1(1363.45,1427.52)
  Top Layer w10: U1.6@1526.15,714.83 1673.9,714.83 1689.44,730.37 v2(1692,730.37)
  Top Layer w20: C7.2@1649.62,740 1660.3,740 1741.05,820.75 2242.64,820.75 2336,727.39 2336,672.54 Q7.2@2314.9,651.44 ; Q7.2@2313.75,650.29 Q7.2@2314.9,651.44 ; R43.2@2370.51,637.51 2356.57,651.44 Q7.2@2314.9,651.44
  Top Layer w30: 2539.76,2366.52 2542.76,2363.52
  Top Layer w40: R3.2@1187.45,2245.29 1187.45,2394.35 ; R2.2@1877.13,2246.09 1877.13,2391.26 v1(1892.39,2406.51) ; R1.2@2542.76,2226.09 2542.76,2363.52
  PWR w30: v2(1344,1032) 1446,1032 1692,786 v2(1692,730.37)
  PWR w60: C1.1@509.45,1534 520,1523.45 520,1162.19 576.19,1106 2256,1106 2324,1038 J3.1@2324,772.76
  Bottom Layer w15: v1(1363.45,1427.52) v1@1363.45,2340.52
  other v1: 484.19,1656 558,1656 616.81,1656 484.19,1749 558,1749 616.81,1749 484.19,1843 558,1843 616.81,1843 484.19,1932.21 558,1932.21 616.81,1932.21 484.19,2016.72 558,2016.72 616.81,2016.72 484.19,2121 558,2121 616.81,2121 538.19,2323 612,2323 693.26,2322.52 1364.22,2338.51 538.19,2392 612,2392 693.26,2391.52 797.79,2407.61 851.33,2407.61 904.87,2407.61 958.42,2407.61 1011.96,2407.61 1065.5,2407.61 1372.84,2409.74 1180.45,2412.9 2023.84,2412.74 1245.84,2413.74 1312.84,2413.74 2145.28,2413.92 2198.82,2413.92 2252.37,2413.92 2305.91,2413.92 2359.45,2413.92 2413,2413.92 1836,2414.75 1959.84,2414.74 1446.22,2415.51 1499.76,2415.51 1553.31,2415.51 1606.85,2415.51 1660.39,2415.51 1713.94,2415.51 693.26,2455.24 538.19,2455.72 612,2455.72 1892.39,2460 797.79,2460.76 851.33,2460.76 904.87,2460.76 958.42,2460.76 1011.96,2460.76 1065.5,2460.76 1372.84,2463.23 2023.84,2466.23 1180.45,2466.39 1245.84,2467.23 1312.84,2467.23 2145.28,2467.07 2198.82,2467.07 2252.37,2467.07 2305.91,2467.07 2359.45,2467.07 2413,2467.07 1836,2468.24 1959.84,2468.23 1446.22,2468.66 1499.76,2468.66 1553.31,2468.66 1606.85,2468.66 1660.39,2468.66 1713.94,2468.66 1892.39,2513 797.79,2513.91 851.33,2513.91 904.87,2513.91 958.42,2513.91 1011.96,2513.91 1065.5,2513.91 1372.84,2516.23 2023.84,2519.23 1180.45,2519.39 1245.84,2520.23 1312.84,2520.23 2145.28,2520.22 2198.82,2520.22 2252.37,2520.22 2305.91,2520.22 2359.45,2520.22 2413,2520.22 1836,2521.24 1959.84,2521.23 1446.22,2521.81 1499.76,2521.81 1553.31,2521.81 1606.85,2521.81 1660.39,2521.81 1713.94,2521.81 538.19,2530.21 612,2530.21 693.26,2529.73 797.79,2567.06 851.33,2567.06 904.87,2567.06 958.42,2567.06 1011.96,2567.06 1065.5,2567.06 1892.39,2570 1372.84,2573.23 2145.28,2573.37 2198.82,2573.37 2252.37,2573.37 2305.91,2573.37 2359.45,2573.37 2413,2573.37 1446.22,2574.96 1499.76,2574.96 1553.31,2574.96 1606.85,2574.96 1660.39,2574.96 1713.94,2574.96 2023.84,2576.23 1180.45,2576.39 1245.84,2577.23 1312.84,2577.23 1836,2578.24 1959.84,2578.23 538.19,2591.21 612,2591.21 693.26,2590.73 797.79,2620.21 851.33,2620.21 904.87,2620.21 958.42,2620.21 1011.96,2620.21 1065.5,2620.21 1372.84,2622.04 1180.45,2625.2 2023.84,2625.04 1245.84,2626.04 1312.84,2626.04 1836,2627.06 1892.39,2626.9 1959.84,2627.04 2145.28,2626.52 2198.82,2626.52 2252.37,2626.52 2305.91,2626.52 2359.45,2626.52 2413,2626.52 1446.22,2628.11 1499.76,2628.11 1553.31,2628.11 1606.85,2628.11 1660.39,2628.11 1713.94,2628.11
VGD: D3.2 J1.1 J3.2 Q7.3 R35.2 | length 1004.4
  Top Layer w20: J1.1@2028.56,504.52 2147.55,504.52 2219.26,576.23 Q7.3@2219.26,612.88 2219.26,744.02 J3.2@2219.32,744.07 ; D3.2@2042.2,293 2094,293 2127.83,326.83 2127.83,498.83
  Bottom Layer w20: J3.2@2225,748 2225,697 2258,664 2414.27,664 R35.2@2478.27,728